# Altium PCB USB.PcbDoc
Units mm, origin at the board's own origin, x right, y up, seen from the top; angles counter-clockwise.
Board outline 25.5 x 25.5 mm, 6 copper layers (1 Top (Sig/Pwr), 2 (GND), 3 (Sig/Pwr), 4 (GND/Sig), 5 (GND), 6 Bottom (Sig/Pwr)), stack 1.74 mm thick; 52 components, 57 nets, 300 pads, 16 vias.
Unrouted connection lines stored in the file: 220.
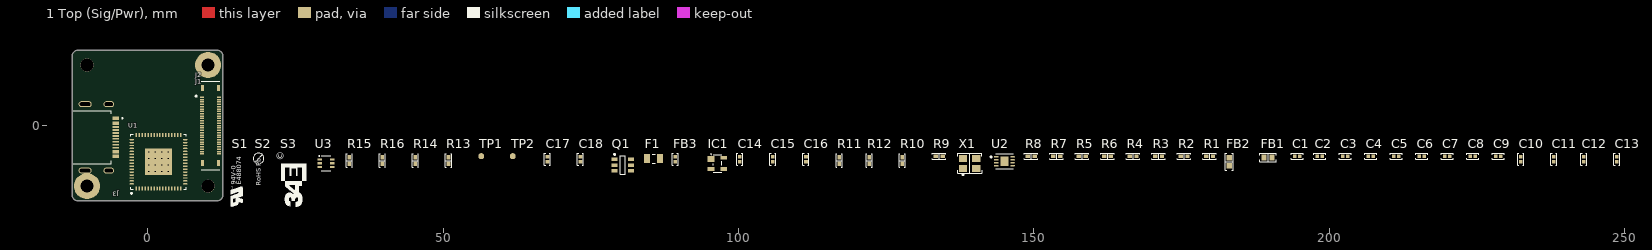
[diagram p0: 1 Top (Sig/Pwr) view]
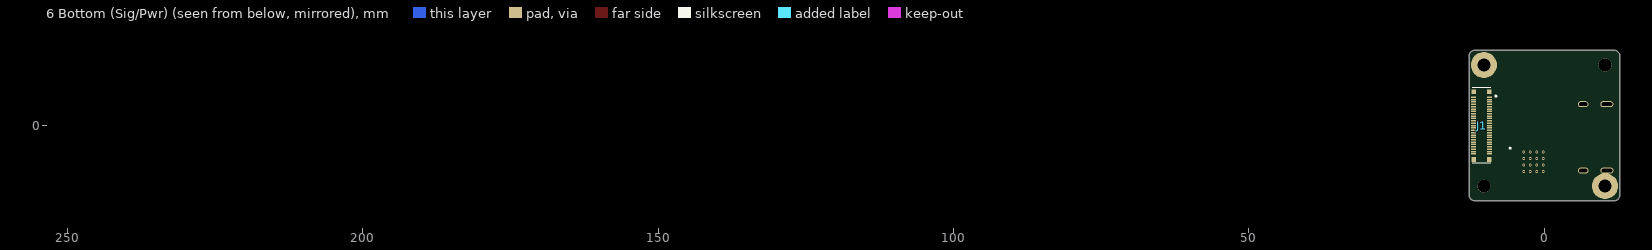
[diagram p1: 6 Bottom (Sig/Pwr) view, seen from below]
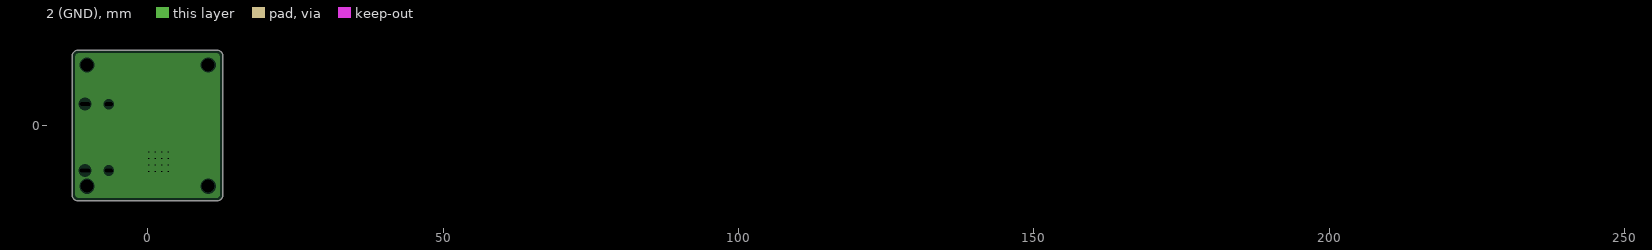
[diagram p2: 2 (GND), clearances drawn from the general rule]
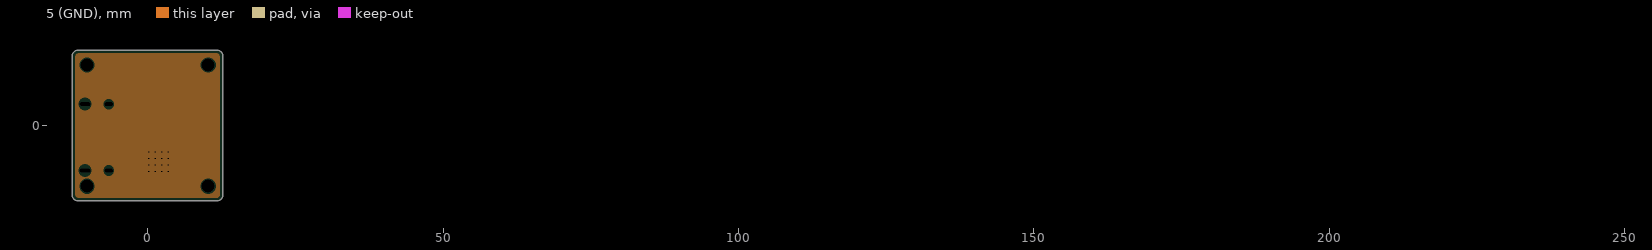
[diagram p3: 5 (GND), clearances drawn from the general rule]

## Layer stack, top to bottom
Top Solder: solder mask 0.0254, SM-001, Dk 4
1 Top (Sig/Pwr): signal copper 0.035
Dielectric 1: prepreg 0.11, PP-015, Dk 4.29
2 (GND): plane copper 0.035, net GND
Dielectric 2: core 0.6, Core-038, Dk 4.6
3 (Sig/Pwr): signal copper 0.035
Dielectric 3: prepreg 0.11, PP-015, Dk 4.29
4 (GND/Sig): signal copper 0.035
Dielectric 4: core 0.6, Core-038, Dk 4.6
5 (GND): plane copper 0.035, net GND
Dielectric 5: prepreg 0.11, PP-015, Dk 4.29
6 Bottom (Sig/Pwr): signal copper 0.035
Bottom Solder: solder mask 0.0254, SM-001, Dk 4

## Board outline
12.75,11.75 12.725,11.973 12.651,12.184 12.532,12.373 12.373,12.532 12.184,12.651 11.973,12.725 11.75,12.75 -11.75,12.75 -11.973,12.725 -12.184,12.651 -12.373,12.532 -12.532,12.373 -12.651,12.184 -12.725,11.973 -12.75,11.75 -12.75,-11.75 -12.725,-11.973 -12.651,-12.184 -12.532,-12.373 -12.373,-12.532 -12.184,-12.651 -11.973,-12.725 -11.75,-12.75 11.75,-12.75 11.973,-12.725 12.184,-12.651 12.373,-12.532 12.532,-12.373 12.651,-12.184 12.725,-11.973 12.75,-11.75

## Design rules (kind name [scope] priority, off if disabled: settings)
BoardOutlineClearance [IsPolygon] p1: gap=0.025 ignorepadtopadclearanceinfootprint=FALSE
Clearance [All] p1: gap=0.152 ignorepadtopadclearanceinfootprint=TRUE except(0.254: SMDPad-SMDPad)
DiffPairsRouting DiffPairsRouting_USB [InDifferentialPair('USB')] p1: maxlimit=0.254 minlimit=0.127 mostfreqgap=0.167 toplayer_mingap=0.254 toplayer_minwidth=0.176 toplayer_maxwidth=0.176 toplayer_prefwidth=0.152 bottomlayer_mingap=0.254 bottomlayer_minwidth=0.176 bottomlayer_maxwidth=0.176 bottomlayer_prefwidth=0.152 impedanceprofiledriven=TRUE impedanceprofileid={CBCFBFA0-D2E2-4D45-9055-C7C9E9EC4FAF} impedanceprofilevalue=90.000000 maxuncoupledlength=12.7
HoleSize [All] p1: absolutevalues=TRUE maxlimit=254 minlimit=0.3 maxpercent=80.000 minpercent=20.000
HoleToHoleClearance HoleToHoleClearance_Via [isVia] p1: gap=0.279 allowstackedmicrovias=TRUE
HoleToHoleClearance [Not isVia] p2: gap=0.406 allowstackedmicrovias=TRUE
MinimumSolderMaskSliver [All] p1: minsoldermaskwidth=0.102
PlaneClearance [All] p1: clearance=0.203
PlaneConnect [All] p1: planeconnectstyle=Direct reliefexpansion=0.508 reliefentries=4 reliefconductorwidth=0.254 reliefairgap=0.254
PolygonConnect PolygonConnect_ThruPin [IsThruPin] p1: thpad.connectstyle=Relief thpad.reliefconductorwidth=0.508 thpad.reliefentries=4 thpad.polygonreliefangle="45 Angle" thpad.airgapwidth=0.254 smdpad.connectstyle=Direct smdpad.reliefconductorwidth=0.254 smdpad.reliefentries=4 smdpad.polygonreliefangle="90 Angle" smdpad.airgapwidth=0.254 via.connectstyle=Relief via.reliefconductorwidth=0.254 via.reliefentries=4 via.polygonreliefangle="90 Angle" via.airgapwidth=0.254
PolygonConnect [All] p2: connectstyle=Direct reliefconductorwidth=0.254 reliefentries=4 polygonreliefangle="90 Angle" airgapwidth=0.254
RoutingVias [All] p1: holewidth=0.3 width=0.5 viastyle="Through Hole" minholewidth=0.3 minwidth=0.5 maxholewidth=0.3 maxwidth=0.5
SilkToSilkClearance [All] p1: silktosilkclearance=0
SilkToSolderMaskClearance [IsPad] p1: minsilkscreentomaskgap=0.152 clearancetoexposedcopper=TRUE
SolderMaskExpansion SolderMaskExpansion_Via [IsVia] p1: expansion=0.102 istentingtop=TRUE
SolderMaskExpansion [Not IsVia] p2: expansion=0.051 istentingtop=FALSE
Width [All] p1: maxlimit=2.032 minlimit=0.152 preferedwidth=0.254 minimp=50.000000 maximp=50.000000 favimp=50.000000
22 further rules are at their usual default settings.

## Classes and differential pairs
differential pair class USB: USB
differential pair USB: +USB_P -USB_N

## Components (designator, comment, footprint, x,y, rotation, side; value= is the part's Value field where it differs from the comment)
C1 "10µF" "CAP 0402_1005" 194.539,-5.207 r0 top
C2 "0.1µF" "CAP 0402_1005" 198.349,-5.207 r0 top
C3 "10µF" "CAP 0402_1005" 202.667,-5.207 r0 top
C4 "0.1µF" "CAP 0402_1005" 206.985,-5.207 r0 top
C5 "10µF" "CAP 0402_1005" 211.303,-5.207 r0 top
C6 "0.1µF" "CAP 0402_1005" 215.621,-5.207 r0 top
C7 "0.1µF" "CAP 0402_1005" 219.939,-5.207 r0 top
C8 "0.1µF" "CAP 0402_1005" 224.257,-5.207 r0 top
C9 "10µF" "CAP 0402_1005" 228.575,-5.207 r0 top
C10 "0.1µF" "CAP 0402_1005" 232.385,-5.715 r90 top
C11 "0.1µF" "CAP 0402_1005" 237.973,-5.715 r90 top
C12 "0.1µF" "CAP 0402_1005" 243.053,-5.715 r90 top
C13 "0.1µF" "CAP 0402_1005" 248.641,-5.715 r90 top
C14 "0.1µF" "CAP 0402_1005" 100.204,-5.715 r90 top
C15 "27pF" "CAP 0402_1005" 105.817,-5.715 r90 top value="27 pF"
C16 "27pF" "CAP 0402_1005" 111.405,-5.715 r90 top value="27 pF"
C17 "0.1µF" "CAP 0402_1005" 67.666,-5.715 r90 top
C18 "10µF" "CAP 0402_1005" 73.254,-5.715 r90 top
F1 "0.75A(H)/1.5A(T)" FP-0ZCK0075FF2E-MFG 85.65,-5.588 r0 top
FB1 "600 Ohms @ 100 MHz" "FER 0603_1608" 189.612,-5.41 r0 top
FB2 "600 Ohms @ 100 MHz" "FER 0603_1608" 183.059,-6.121 r90 top
FB3 "10 Ohms @ 100 MHz" "FER 0402_1005" 89.282,-5.715 r90 top
IC1 "PRTR5V0U2X,215" SOT143B 96.445,-6.401 r0 top
J1 "2049270501" 2049270501 10.65,0 r0 top locked
J2 "2049280501" 2049280501 10.65,0 r0 top locked
J3 "2169900003" 2169900003 -10.56,-2 r270 top
Q1 "DMP3056LDM-7" SOT95P285X130-6N 80.417,-6.68 r0 top
R1 "1k" "RES 0402_1005" 179.731,-5.232 r0 top value="1 kOhms"
R2 "12k 1%" "RES 0402_1005" 175.413,-5.232 r0 top value="12 kOhms"
R3 "100" "RES 0402_1005" 171.095,-5.232 r0 top value="100 Ohms"
R4 "100" "RES 0402_1005" 166.777,-5.232 r0 top value="100 Ohms"
R5 "10k" "RES 0402_1005" 158.167,-5.232 r0 top value="10 kOhms"
R6 "10k" "RES 0402_1005" 162.459,-5.232 r0 top value="10 kOhms"
R7 "100" "RES 0402_1005" 153.849,-5.232 r0 top value="100 Ohms"
R8 "100" "RES 0402_1005" 149.531,-5.232 r0 top value="100 Ohms"
R9 "4.7k 1%" "RES 0402_1005" 133.96,-5.232 r0 top value="4.7 kOhms"
R10 "2.2k 1%" "RES 0402_1005" 127.687,-5.918 r90 top value="2.2 kOhms"
R11 "10k 1%" "RES 0402_1005" 117.019,-5.918 r90 top value="10 kOhms"
R12 "10k 1%" "RES 0402_1005" 122.099,-5.918 r90 top value="10 kOhms"
R13 "5.1k" "RES 0402_1005" 50.928,-5.918 r90 top value="5.1 kOhms"
R14 "5.1k" "RES 0402_1005" 45.314,-5.918 r90 top value="5.1 kOhms"
R15 "100k 1%" "RES 0402_1005" 34.138,-5.918 r90 top value="100 kOhms"
R16 "1M 1%" "RES 0402_1005" 39.726,-5.918 r90 top value="1 MOhms"
S1 "" UL 14.987,-10.135 r90 top
S2 "" RoHS 18.797,-7.518 r90 top
S3 "" 34EngineeringLogo 27.153,-14.046 r90 top
TP1 "" TestPoint1mm 56.465,-5.182 r90 top
TP2 "" TestPoint1mm 61.799,-5.182 r90 top
U1 "FT2232HQ-Tray" QFN64_2_N 1.85,-6.125 r90 top
U2 "AT93C46DY6-YH-T" FP-C04-21355-Q4B-IPC_C 145.009,-6.045 r0 top
U3 "DZDH0401DW-7" DZDH0401DW-7 30.176,-6.375 r0 top
X1 "ABM8G-12.000MHZ-4Y-T3" ABM8G-12.000MHZ-4Y-T3 139.117,-6.401 r0 top

## Footprints (in the part's own frame and the unit in brackets; to place one, negate y for a bottom-side part, rotate by r counter-clockwise, add the part's x,y. Pads: shape width x height; smd on the part's side, far side on the other; paste and mask are expansions set on the pad)
34EngineeringLogo [mm]
  silkscreen extent 0.33,0.32 7.61,4.55
2049270501 [mm]
  rect 0.81x0.25 smd far side paste+0 mask+0: 1(-1.345,4.8) 2(-1.345,4.4) 3(-1.345,4) 4(-1.345,3.6) 5(-1.345,3.2) 6(-1.345,2.8) 7(-1.345,2.4) 8(-1.345,2) 9(-1.345,1.6) 10(-1.345,1.2) 11(-1.345,0.8) 12(-1.345,0.4) 13(-1.345,0) 14(-1.345,-0.4) 15(-1.345,-0.8) 16(-1.345,-1.2) 17(-1.345,-1.6) 18(-1.345,-2) 19(-1.345,-2.4) 20(-1.345,-2.8) 21(-1.345,-3.2) 22(-1.345,-3.6) 23(-1.345,-4) 24(-1.345,-4.4) 25(-1.345,-4.8) 26(1.345,-4.8) 27(1.345,-4.4) 28(1.345,-4) 29(1.345,-3.6) 30(1.345,-3.2) 31(1.345,-2.8) 32(1.345,-2.4) 33(1.345,-2) 34(1.345,-1.6) 35(1.345,-1.2) 36(1.345,-0.8) 37(1.345,-0.4) 38(1.345,0) 39(1.345,0.4) 40(1.345,0.8) 41(1.345,1.2) 42(1.345,1.6) 43(1.345,2) 44(1.345,2.4) 45(1.345,2.8) 46(1.345,3.2) 47(1.345,3.6) 48(1.345,4) 49(1.345,4.4) 50(1.345,4.8)
  rect 0.77x0.8 smd far side paste+0 mask+0: MNT(-1.325,-5.73) MNT(-1.325,5.73) MNT(1.325,-5.73) MNT(1.325,5.73)
  body extent -1.59,-6.41 1.59,6.41
2049280501 [mm]
  rect 0.63x0.25 smd paste+0 mask+0: 1(-1.435,4.8) 2(-1.435,4.4) 3(-1.435,4) 4(-1.435,3.6) 5(-1.435,3.2) 6(-1.435,2.8) 7(-1.435,2.4) 8(-1.435,2) 9(-1.435,1.6) 10(-1.435,1.2) 11(-1.435,0.8) 12(-1.435,0.4) 13(-1.435,0) 14(-1.435,-0.4) 15(-1.435,-0.8) 16(-1.435,-1.2) 17(-1.435,-1.6) 18(-1.435,-2) 19(-1.435,-2.4) 20(-1.435,-2.8) 21(-1.435,-3.2) 22(-1.435,-3.6) 23(-1.435,-4) 24(-1.435,-4.4) 25(-1.435,-4.8) 26(1.435,-4.8) 27(1.435,-4.4) 28(1.435,-4) 29(1.435,-3.6) 30(1.435,-3.2) 31(1.435,-2.8) 32(1.435,-2.4) 33(1.435,-2) 34(1.435,-1.6) 35(1.435,-1.2) 36(1.435,-0.8) 37(1.435,-0.4) 38(1.435,0) 39(1.435,0.4) 40(1.435,0.8) 41(1.435,1.2) 42(1.435,1.6) 43(1.435,2) 44(1.435,2.4) 45(1.435,2.8) 46(1.435,3.2) 47(1.435,3.6) 48(1.435,4) 49(1.435,4.4) 50(1.435,4.8)
  rect 0.5x1 smd paste+0 mask+0: MNT(-1.34,-6.36) MNT(-1.34,6.36) MNT(1.34,-6.36) MNT(1.34,6.36)
  silkscreen extent -2.55,-7.5 1.6,7.5, body extent -1.6,-7.5 1.6,7.5, height 2.37
2169900003 [mm]
  rect 0.6x1.1 smd: A1B12(-3.2,5.15) A4B9(-2.4,5.15) B1A12(3.2,5.15) B4A9(2.4,5.15)
  rect 0.3x1.1 smd: A5(-1.25,5.15) A6(-0.25,5.15) A7(0.25,5.15) A8(1.25,5.15) B5(1.75,5.15) B6(0.75,5.15) B7(-0.75,5.15) B8(-1.75,5.15)
  rrect100% 1x1.8 hole 0.6 slot 1.4 at 90 deg: MNT(-5.62,4) MNT(5.62,4)
  rrect100% 1x2.2 hole 0.6 slot 1.8 at 90 deg: MNT(-5.62,0) MNT(5.62,0)
  silkscreen extent -4.47,-2.02 4.47,6.41, body extent -5.77,-2.1 5.77,5.1, height 2.18
ABM8G-12.000MHZ-4Y-T3 [mil]
  rect 55x47 smd: 1(-43.5,-33.5) 2(43.5,-33.5) 3(43.5,33.5) 4(-43.5,33.5)
  silkscreen extent -81,-80 81,67, body extent -63,-49 63,49, height 39
"CAP 0402_1005" [mm] "Chip Capacitor, 2-Leads, Body 1.02x0.51mm, IPC Medium Density"
  rect 0.6x0.64 smd: 1(-0.44,0) 2(0.44,0)
  silkscreen extent -1,-0.5 1,0.5, body extent -0.5,-0.26 0.5,0.26, height 0.52
DZDH0401DW-7 [mil]
  rect 30.81x14 smd paste+0 mask+0: 1(-41.9,25.59) 2(-41.9,0) 3(-41.9,-25.59) 4(41.9,-25.59) 5(41.9,0) 6(41.9,25.59)
  silkscreen extent -45,-48 32,50, body extent -43,-44 43,44, height 43
"FER 0402_1005" [mm] "Chip Ferrite, 2-Leads, Body 1.02x0.51mm, IPC Medium Density"
  rect 0.6x0.64 smd: 1(-0.44,0) 2(0.44,0)
  silkscreen extent -1,-0.5 1,0.5, body extent -0.5,-0.26 0.5,0.26, height 0.52
"FER 0603_1608" [mm] "Chip Ferrite, 2-Leads, Body 1.60x0.80mm, IPC Medium Density"
  rect 0.9x1 smd: 1(-0.675,0) 2(0.675,0)
  silkscreen extent -1.4,-0.7 1.4,0.7, body extent -0.8,-0.41 0.8,0.41, height 0.82
FP-0ZCK0075FF2E-MFG [mm]
  rect 1x1.5 smd paste+0 mask+0: 1(-1.1,0) 2(1.1,0)
  silkscreen extent -0.23,-0.75 0.23,0.75, body extent -1.7,-0.85 1.7,0.85, height 0.25
FP-C04-21355-Q4B-IPC_C [mm]
  rect 0.761x0.239 smd paste+0 mask+0: 1(-1.376,0.75)
  rrect100% 0.761x0.239 smd paste+0 mask+0: 2(-1.376,0.25) 3(-1.376,-0.25) 4(-1.376,-0.75) 5(1.376,-0.75) 6(1.376,-0.25) 7(1.376,0.25) 8(1.376,0.75)
  rect 1.4x1.6 smd paste-1000 mask+0: 9(0,0)
  silkscreen extent -2.37,-1.3 1.5,1.3, body extent -1.86,-1.1 1.86,1.1, height 0.25
QFN64_2_N [mm] "QFN, 64-Leads, Body 9x9mm, Pitch 0.5mm, Thermal Pad 4.5x4.5mm, IPC Medium Density"
  oval 0.75x0.25 smd: 1(-4.525,3.75) 2(-4.525,3.25) 3(-4.525,2.75) 4(-4.525,2.25) 5(-4.525,1.75) 6(-4.525,1.25) 7(-4.525,0.75) 8(-4.525,0.25) 9(-4.525,-0.25) 10(-4.525,-0.75) 11(-4.525,-1.25) 12(-4.525,-1.75) 13(-4.525,-2.25) 14(-4.525,-2.75) 15(-4.525,-3.25) 16(-4.525,-3.75) 33(4.525,-3.75) 34(4.525,-3.25) 35(4.525,-2.75) 36(4.525,-2.25) 37(4.525,-1.75) 38(4.525,-1.25) 39(4.525,-0.75) 40(4.525,-0.25) 41(4.525,0.25) 42(4.525,0.75) 43(4.525,1.25) 44(4.525,1.75) 45(4.525,2.25) 46(4.525,2.75) 47(4.525,3.25) 48(4.525,3.75)
  oval 0.25x0.75 smd: 17(-3.75,-4.525) 18(-3.25,-4.525) 19(-2.75,-4.525) 20(-2.25,-4.525) 21(-1.75,-4.525) 22(-1.25,-4.525) 23(-0.75,-4.525) 24(-0.25,-4.525) 25(0.25,-4.525) 26(0.75,-4.525) 27(1.25,-4.525) 28(1.75,-4.525) 29(2.25,-4.525) 30(2.75,-4.525) 31(3.25,-4.525) 32(3.75,-4.525) 49(3.75,4.525) 50(3.25,4.525) 51(2.75,4.525) 52(2.25,4.525) 53(1.75,4.525) 54(1.25,4.525) 55(0.75,4.525) 56(0.25,4.525) 57(-0.25,4.525) 58(-0.75,4.525) 59(-1.25,4.525) 60(-1.75,4.525) 61(-2.25,4.525) 62(-2.75,4.525) 63(-3.25,4.525) 64(-3.75,4.525)
  rect 4.5x4.5 smd: 65(0,0)
  silkscreen extent -5.46,-4.69 4.69,4.69, body extent -4.54,-4.54 4.54,4.54, height 1
"RES 0402_1005" [mm] "Chip Resistor, 2-Leads, Body 1.0x0.5mm, IPC Medium Density"
  rect 0.75x0.6 smd: 1(-0.575,0) 2(0.575,0)
  silkscreen extent -1.14,-0.51 1.14,0.51, body extent -0.5,-0.25 0.5,0.25, height 0.35
RoHS [mm]
  silkscreen extent 1.05,-0.9 2.85,0.9
SOT95P285X130-6N [mm] "SOT23, 6-Leads, Body 3.00x2.85mm, Pitch 0.95mm, IPC Medium Density"
  rect 1.05x0.6 smd: 1(-1.375,0.95) 2(-1.375,0) 3(-1.375,-0.95) 4(1.375,-0.95) 5(1.375,0) 6(1.375,0.95)
  silkscreen extent -1.5,-1.55 0.45,1.92, body extent -1.5,-1.55 1.5,1.55, height 1.3
SOT143B [mm] "SOT143, 4-Leads, Body 2.90x2.30mm, Pitch 1.90mm, IPC Medium Density"
  rect 1.15x1 smd: 1(-1.075,0.75)
  rect 1.15x0.6 smd: 2(-1.075,-0.95) 3(1.075,-0.95) 4(1.075,0.95)
  silkscreen extent -1.12,-1.5 0.7,1.6, body extent -1.1,-1.45 1.1,1.45, height 1
TestPoint1mm [mm]
  round 1 smd: 1(0,0)
UL [mm]
  silkscreen extent -3.57,-1.1 -0.22,0.93

## Part data
C1 C3 C5 C9 C18: library part 0402ZD106MAT2A, "CAP CER 10UF 10V X5R 0402", Device Package="0402 (1005 Metric)", Manufacturer="AVX Corporation", Operating Temperature="-55°C ~ 85°C", Supplier Part Number 1=478-10052-1-ND, Temperature Coefficient=X5R, Tolerance=±20%, Voltage - Rated=10V, Applications="General Purpose", Capacitance=10µF, ComponentLink1Description=Datasheet, ComponentLink1URL=http://datasheets.avx.com/cx5r.pdf, ComponentLink2Description="DigiKey Link", ComponentLink2URL=http://digikey.com/product-detail/en/avx-corporation/0402ZD106MAT2A/478-10052-1-ND/6564275, lastupdated="2/8/2022 12:26:50 PM", Lifecycle Status=Active, Minimum Order=1, Mounting Type="Surface Mount, MLCC", Package / Case="0402 (1005 Metric)", Packaging=TapeAndReel, Part Number=0402ZD106MAT2A, Part Status=Active, partid=6854, price=0.24, Series=-, Size / Dimension="0.039\" L x 0.020\" W (1.00mm x 0.50mm)", Supplier 1=DigiKey, Thickness (Max)="0.028\" (0.71mm)"
C2 C4 C6 C7 C8 C10 C11 C12 C13 C14 C17: library part 0402ZC104KAT2A, "CAP CER 0.1UF 10V X7R 0402", Device Package="0402 (1005 Metric)", Manufacturer="AVX Corporation", Operating Temperature="-55°C ~ 125°C", Supplier Part Number 1=478-7891-1-ND, Temperature Coefficient=X7R, Tolerance=±10%, Voltage - Rated=10V, Applications="General Purpose", Capacitance=0.1µF, ComponentLink1Description=Datasheet, ComponentLink1URL=http://datasheets.avx.com/X7RDielectric.pdf, ComponentLink2Description="DigiKey Link", ComponentLink2URL=http://digikey.com/product-detail/en/avx-corporation/0402ZC104KAT2A/478-7891-1-ND/3881514, lastupdated="2/8/2022 12:26:59 PM", Lifecycle Status=Active, Minimum Order=1, Mounting Type="Surface Mount, MLCC", Package / Case="0402 (1005 Metric)", Packaging=TapeAndReel, Part Number=0402ZC104KAT2A, Part Status=Active, partid=1757, price=0.09, Series=-, Size / Dimension="0.039\" L x 0.020\" W (1.00mm x 0.50mm)", Supplier 1=DigiKey, Thickness (Max)="0.022\" (0.55mm)"
C15 C16: library part C0402C270J3GAC7867, "CAP CER 27PF 25V NP0 0402", Capacitance="27 pF", Device Package="0402 (1005 Metric)", Manufacturer=KEMET, Operating Temperature="-55°C ~ 125°C", Supplier Part Number 1=399-14437-1-ND, Temperature Coefficient="C0G, NP0", Tolerance=±5%, Voltage - Rated=25V, Applications="General Purpose", ComponentLink1Description=Datasheet, ComponentLink1URL=https://api.kemet.com/component-edge/download/datasheet/C0402C270J3GACTU.pdf, ComponentLink2Description="DigiKey Link", ComponentLink2URL=https://www.digikey.com/en/products/detail/kemet/C0402C270J3GAC7867/2196521, Features="Low ESL", lastupdated="7/10/2022 8:59:41 AM", Lifecycle Status=Active, Minimum Order=1, Mounting Type="Surface Mount, MLCC", Package / Case="0402 (1005 Metric)", Packaging=TapeAndReel, Part Number=C0402C270J3GAC7867, Part Status=Active, partid=1740, price=0.06, Series="SMD Comm C0G", Size / Dimension="0.039\" L x 0.020\" W (1.00mm x 0.50mm)", Supplier 1=DigiKey, Thickness (Max)="0.022\" (0.55mm)"
F1: library part CMP-16043-000005-1, "PTC RESET FUSE 6V 750MA 0805", Case Code (Imperial)=0805, Case Code (Metric)=2012, Hold Current=750mA, Max Current Rating=40A, Package Quantity=1, Trip Current=1.5A, Case/Package=0805, Lead Free="Lead Free", Packaging="Tape and Reel", Time to Trip=0.2s
FB1 FB2: library part BLM18AG601SN1D, "FERRITE BEAD 600 OHM 0603 1LN", Current Rating (Max)=500mA, DC Resistance (DCR) (Max)=380mOhm, Device Package="0603 (1608 Metric)", Manufacturer="Murata Electronics", Operating Temperature="-55°C ~ 125°C", Supplier Part Number 1=490-1014-1-ND, ComponentLink1Description=Datasheet, ComponentLink1URL=https://www.murata.com/en-us/products/productdata/8796738650142/ENFA0003.pdf, ComponentLink2Description="DigiKey Link", ComponentLink2URL=https://www.digikey.com/en/products/detail/murata-electronics/BLM18AG601SN1D/584225, Height (Max)="0.037\" (0.95mm)", Impedance @ Frequency="600 Ohms @ 100 MHz", lastupdated="7/10/2022 9:43:27 AM", Lifecycle Status=Active, Minimum Order=1, Mounting Type="Surface Mount", Number of Lines=1, Package / Case="0603 (1608 Metric)", Packaging=TapeAndReel, Part Number=BLM18AG601SN1D, Part Status=Active, partid=848, price=0.02, Series="EMIFIL®, BLM18", Size / Dimension="0.063\" L x 0.032\" W (1.60mm x 0.80mm)", Supplier 1=DigiKey
FB3: library part BLM15AG100SN1D, "FERRITE BEAD 10 OHM 0402 1LN", Current Rating (Max)=1A, DC Resistance (DCR) (Max)=25mOhm, Device Package="0402 (1005 Metric)", Manufacturer="Murata Electronics", Operating Temperature="-55°C ~ 125°C", Supplier Part Number 1=490-5176-1-ND, ComponentLink1Description=Datasheet, ComponentLink1URL=https://www.murata.com/en-us/products/productdata/8796740059166/ENFA0018.pdf, ComponentLink2Description="DigiKey Link", ComponentLink2URL=https://www.digikey.com/en/products/detail/murata-electronics/BLM15AG100SN1D/1948283, Height (Max)="0.022\" (0.55mm)", Impedance @ Frequency="10 Ohms @ 100 MHz", lastupdated="7/10/2022 9:42:59 AM", Lifecycle Status=Active, Minimum Order=1, Mounting Type="Surface Mount", Number of Lines=1, Package / Case="0402 (1005 Metric)", Packaging=TapeAndReel, Part Number=BLM15AG100SN1D, Part Status=Active, partid=230, price=0.01, Series="EMIFIL®, BLM15", Size / Dimension="0.039\" L x 0.022\" W (1.00mm x 0.55mm)", Supplier 1=DigiKey
IC1: "TVS DIODE 5.5V SOT143B", Capacitance @ Frequency="1pF @ 1MHz", Device Package="TO-253-4, TO-253AA", Manufacturer="Nexperia USA Inc.", Operating Temperature="-40°C ~ 85°C (TA)", Power Line Protection=Yes, Supplier Device Package=SOT-143B, Supplier Part Number 1=1727-3884-2-ND, Voltage - Breakdown (Min)=6V, Voltage - Reverse Standoff (Typ)="5.5V (Max)", Applications="General Purpose", ComponentLink1Description=Datasheet, ComponentLink1URL=https://assets.nexperia.com/documents/data-sheet/PRTR5V0U2X.pdf, ComponentLink2Description="DigiKey Link", ComponentLink2URL=//digikey.com/product-detail/en/nexperia-usa-inc/PRTR5V0U2X215/1727-3884-2-ND/1163690, lastupdated="12/9/2019 9:29:05 PM", Lifecycle Status=0, Minimum Order=1, Mounting Type="Surface Mount", Package / Case="TO-253-4, TO-253AA", Packaging=TapeAndReel, Part Number=PRTR5V0U2X,215, Part Status=Active, partid=5451, price=0.18, Series=-, Supplier 1=DigiKey, Type="Steering (Rail to Rail)", Unidirectional Channels=2
J1: "SlimStack Board-to-Board Receptacle, 0.40mm Pitch, FSB3 Floating Series, 3.00mm Mated Height, 3.20mm Mated Width, 50...", Manufacturer=Molex, Manufacturer Part Number=203955-0503, Supplier Part Number 1=538-204927-0501, Pricing 1="1=3.72000, 10=3.28000, 50=3.28000, 100=2.61000, 1000=2.16000, 10000=2.01000 (USD)", RoHS=No, Stock 1=8587, Supplier 1=Mouser
J2: "SlimStack Board-to-Board Plug, 0.40mm Pitch, FSB3 Floating Series, 3.00mm Mated Height, 3.20 Mated Width, 50 Circuits", Manufacturer=Molex, Manufacturer Part Number=203955-0503, Supplier Part Number 1=538-204928-0501, Pricing 1="1=4.46000, 10=3.93000, 50=3.93000, 100=3.13000, 500=3.04000, 1000=2.59000, 3000=2.41000, 6000=2.32000, 9000=2.23000, 10000=2.41000 (USD)", RoHS=No, Stock 1=8554, Supplier 1=Mouser
J3: "USB-C (USB TYPE-C) USB 2.0 Receptacle Connector 24 (16+8 Dummy) Position Surface Mount, Right Angle; Through Hole", Manufacturer=Molex, Package=None, Supplier Part Number 1=900-2169900003CT-ND, Availability="In Stock", Check_prices=https://www.snapeda.com/parts/2169900003/Molex/view-part/?ref=eda, Manufacturer Part Number=2169900003, MF=Molex, MP=2169900003, price=None, Pricing 1="1=0.85000, 10=0.70500, 100=0.58720 (USD)", Purchase-URL=https://pricing.snapeda.com/search/part/2169900003/?ref=eda, RoHS=No, SnapEDA_Link=https://www.snapeda.com/parts/2169900003/Molex/view-part/?ref=snap, Stock 1=5473, Supplier 1=Digi-Key
Q1: "Trans Mosfet P-ch 30V 4.3A 6-PIN SOT-26 T/r / Mosfet P-ch 30V 4.3A SOT-26", Case/Package=SOT-26-6, Continuous Drain Current (ID)=4.3A, Drain to Source Breakdown Voltage=-30V, Drain to Source Resistance=45mR, Drain to Source Voltage (Vdss)=30V, Gate to Source Voltage (Vgs)=10V, Input Capacitance=948pF, Manufacturer=Diodes, Manufacturer_Part_Number=DMG4407SSS-13, Max Operating Temperature=150°C, Max Power Dissipation=1.5W, Mfr_Name="Diodes Inc", Min Operating Temperature=-55°C, Package Quantity=3000, Category=MOSFETs, ComponentLink1Description=https://datasheet.ciiva.com/935/ds31449-935056.pdf?src-supplier=Digi-Key, ComponentLink1URL=https://datasheet.ciiva.com/935/ds31449-935056.pdf?src-supplier=Digi-Key, ComponentLink2Description=https://datasheet.ciiva.com/935/ds31449-935055.pdf?src-supplier=Digi-Key, ComponentLink2URL=https://datasheet.ciiva.com/935/ds31449-935055.pdf?src-supplier=Digi-Key, ComponentLink3Description=https://datasheet.ciiva.com/935/ds31449-935057.pdf?src-supplier=Digi-Key, ComponentLink3URL=https://datasheet.ciiva.com/935/ds31449-935057.pdf?src-supplier=Digi-Key, ComponentLink4Description=https://datasheet.ciiva.com/11176/ds31449-11176470.pdf?src-supplier=Avnet, ComponentLink4URL=https://datasheet.ciiva.com/11176/ds31449-11176470.pdf?src-supplier=Avnet, ComponentLink5Description=https://datasheet.ciiva.com/8115/ds31449-8115483.pdf?src-supplier=Avnet, ComponentLink5URL=https://datasheet.ciiva.com/8115/ds31449-8115483.pdf?src-supplier=Avnet, Copyright="Copyright (C) 2022 Ultra Librarian. All rights reserved.", Element Configuration=Single, Fall Time=22.3ns, Height=1.1mm, Lead Free="Lead Free", Length=3mm, Manufacturer Part Number=DMP3056LDM-7, Mount="Surface Mount", Number of Channels=1, Number of Elements=1, Number of Pins=6, Packaging="Cut Tape", Polarity=P-CHANNEL, Power Dissipation=1.5W, Pricing 1="1=0.31620, 10=0.31310, 25=0.30990, 100=0.23530, 250=0.23300, 500=0.20610, 1000=0.19360, 3000=0.17330 (USD)", Radiation Hardening=No, Rds On Max=45mR, REACH SVHC="No SVHC", RefDes=RefDes, Rise Time=6.6ns, RoHS=Yes, RoHS Compliant=Yes, Series=DMP3056, Stock 1=366, Supplier 1="Arrow Electronics", Supplier Part Number 1=DMP3056LDM-7, Turn-Off Delay Time=50.1ns, Turn-On Delay Time=10.2ns, Type=DEV, Weight=0.000529oz, Width=1.6mm
R1: library part RQ73C1E1K0BTD, "RES 1 KOHMS 0.1% 1/16W 0402", Device Package="0402 (1005 Metric)", Manufacturer="TE Connectivity Passive Product", Operating Temperature="-55°C ~ 155°C", Power (Watts)="0.063W, 1/16W", Ratings=AEC-Q200, Resistance="1 kOhms", Supplier Device Package=0402, Supplier Part Number 1=A139941CT-ND, Temperature Coefficient=±10ppm/°C, Tolerance=±0.1%, ComponentLink1Description=Datasheet, ComponentLink1URL=//media.digikey.com/pdf/Data%20Sheets/Tyco%20Electronics%20P%20B%20PDFs/RQ73-0618%20v2.pdf, ComponentLink2Description="DigiKey Link", ComponentLink2URL=https://www.digikey.com/en/products/detail/te-connectivity-passive-product/RQ73C1E1K0BTD/9479889, Composition="Thin Film", Features="Anti-Sulfur, Automotive AEC-Q200", Height - Seated (Max)="0.016\" (0.40mm)", lastupdated="7/10/2022 9:15:05 AM", Lifecycle Status=Active, Minimum Order=1, Number of Terminations=2, Package / Case="0402 (1005 Metric)", Packaging=TapeAndReel, Part Number=RQ73C1E1K0BTD, Part Status=Active, partid=3061, price=0.28, Series=RQ73, Size / Dimension="0.039\" L x 0.020\" W (1.00mm x 0.50mm)", Supplier 1=DigiKey
R2: library part RMCF0402FT12K0, "RES 12K OHM 1% 1/16W 0402", Device Package="0402 (1005 Metric)", Manufacturer="Stackpole Electronics Inc", Operating Temperature="-55°C ~ 155°C", Power (Watts)="0.063W, 1/16W", Ratings=AEC-Q200, Resistance="12 kOhms", Supplier Device Package=0402, Supplier Part Number 1=RMCF0402FT12K0CT-ND, Temperature Coefficient=±100ppm/°C, Tolerance=±1%, ComponentLink1Description=Datasheet, ComponentLink1URL=https://www.seielect.com/catalog/sei-rmcf_rmcp.pdf, ComponentLink2Description="DigiKey Link", ComponentLink2URL=https://www.digikey.com/en/products/detail/stackpole-electronics-inc/RMCF0402FT12K0/1714419, Composition="Thick Film", Features="Automotive AEC-Q200", Height - Seated (Max)="0.016\" (0.40mm)", lastupdated="7/10/2022 9:15:01 AM", Lifecycle Status=Active, Minimum Order=1, Number of Terminations=2, Package / Case="0402 (1005 Metric)", Packaging=CutTape, Part Number=RMCF0402FT12K0, Part Status=Active, partid=4499, price=0.01, Series=RMCF, Size / Dimension="0.039\" L x 0.020\" W (1.00mm x 0.50mm)", Supplier 1=DigiKey
R3 R4 R7 R8: library part RCA0402100RFKED, "RES SMD 100 OHM 1% 1/16W 0402", Device Package="0402 (1005 Metric)", Manufacturer="Vishay Dale", Operating Temperature="-55°C ~ 155°C", Power (Watts)="0.063W, 1/16W", Ratings=AEC-Q200, Resistance="100 Ohms", Supplier Device Package=0402, Supplier Part Number 1=541-2177-1-ND, Temperature Coefficient=±100ppm/°C, Tolerance=±1%, ComponentLink1Description=Datasheet, ComponentLink1URL=http://www.vishay.com/docs/20037/rcae3.pdf, ComponentLink2Description="DigiKey Link", ComponentLink2URL=http://digikey.com/product-detail/en/vishay-dale/RCA0402100RFKED/541-2177-1-ND/4946830, Composition="Thick Film", Features="Anti-Sulfur, Automotive AEC-Q200", Height - Seated (Max)="0.016\" (0.40mm)", lastupdated="7/10/2022 9:15:04 AM", Lifecycle Status=Active, Minimum Order=1, Number of Terminations=2, Package / Case="0402 (1005 Metric)", Packaging=TapeAndReel, Part Number=RCA0402100RFKED, Part Status=Active, partid=3179, price=0.01, Series=RCA, Size / Dimension="0.039\" L x 0.020\" W (1.00mm x 0.50mm)", Supplier 1=DigiKey
R5 R6 R11: library part MCS0402MC1002FE000, "RES SMD 10K OHM 1% 1/10W 0402", Device Package="0402 (1005 Metric)", Manufacturer="Vishay Beyschlag", Operating Temperature="-55°C ~ 175°C", Power (Watts)="0.1W, 1/10W", Ratings=AEC-Q200, Resistance="10 kOhms", Supplier Device Package=0402, Supplier Part Number 1=MCS0402-10.0K-MFCT-ND, Temperature Coefficient=±50ppm/°C, Tolerance=±1%, ComponentLink1Description=Datasheet, ComponentLink1URL=http://www.vishay.com/docs/28760/mcat_pro.pdf, ComponentLink2Description="DigiKey Link", ComponentLink2URL=http://digikey.com/product-detail/en/vishay-beyschlag/MCS0402MC1002FE000/MCS0402-10.0K-MFCT-ND/3883092, Composition="Thin Film", Features="Anti-Sulfur, Automotive AEC-Q200", Height - Seated (Max)="0.015\" (0.37mm)", lastupdated="7/10/2022 9:15:04 AM", Lifecycle Status=Active, Minimum Order=1, Number of Terminations=2, Package / Case="0402 (1005 Metric)", Packaging=TapeAndReel, Part Number=MCS0402MC1002FE000, Part Status=Active, partid=3152, price=0.03, Series="MCS AT - Professional", Size / Dimension="0.039\" L x 0.020\" W (1.00mm x 0.50mm)", Supplier 1=DigiKey
R9: library part RT0402FRE074K7L, "RES SMD 4.7K OHM 1% 1/16W 0402", Device Package="0402 (1005 Metric)", Manufacturer=Yageo, Operating Temperature="-55°C ~ 155°C", Power (Watts)="0.063W, 1/16W", Resistance="4.7 kOhms", Supplier Device Package=0402, Supplier Part Number 1=YAG3347CT-ND, Temperature Coefficient=±50ppm/°C, Tolerance=±1%, ComponentLink1Description=Datasheet, ComponentLink1URL=https://www.yageo.com/upload/media/product/productsearch/datasheet/rchip/PYu-RT_1-to-0.01_RoHS_L_11.pdf, ComponentLink2Description="DigiKey Link", ComponentLink2URL=https://www.digikey.com/en/products/detail/yageo/RT0402FRE074K7L/1072052, Composition="Thin Film", Height - Seated (Max)="0.014\" (0.35mm)", lastupdated="7/10/2022 9:15:04 AM", Lifecycle Status=Active, Minimum Order=1, Number of Terminations=2, Package / Case="0402 (1005 Metric)", Packaging=TapeAndReel, Part Number=RT0402FRE074K7L, Part Status=Active, partid=3198, price=0.01, Series=RT, Size / Dimension="0.039\" L x 0.020\" W (1.00mm x 0.50mm)", Supplier 1=DigiKey
R10: library part SR0402FR-7T2K2L, "RES 2.2K OHM 1% 1/5W 0402", Device Package="0402 (1005 Metric)", Manufacturer=Yageo, Operating Temperature="-55°C ~ 155°C", Power (Watts)="0.2W, 1/5W", Ratings=AEC-Q200, Resistance="2.2 kOhms", Supplier Device Package=0402, Supplier Part Number 1=YAG5818CT-ND, Temperature Coefficient=±100ppm/°C, Tolerance=±1%, ComponentLink1Description=Datasheet, ComponentLink1URL=http://www.yageo.com/documents/recent/PYu-SR_D_F%20tol_RoHS_L_4.pdf, ComponentLink2Description="DigiKey Link", ComponentLink2URL=https://www.digikey.com/en/products/detail/yageo/SR0402FR-7T2K2L/9373092, Composition="Thick Film", Features="Automotive AEC-Q200, Pulse Withstanding", Height - Seated (Max)="0.016\" (0.40mm)", lastupdated="7/10/2022 9:15:01 AM", Lifecycle Status=Active, Minimum Order=1, Number of Terminations=2, Package / Case="0402 (1005 Metric)", Packaging=TapeAndReel, Part Number=SR0402FR-7T2K2L, Part Status=Active, partid=4414, price=0.11, Series=SR, Size / Dimension="0.039\" L x 0.020\" W (1.00mm x 0.50mm)", Supplier 1=DigiKey
R12: library part RCG040210K0FKED, "RES SMD 10K OHM 1% 1/16W 0402", Device Package="0402 (1005 Metric)", Manufacturer="Vishay Dale", Operating Temperature="-55°C ~ 155°C", Power (Watts)="0.063W, 1/16W", Resistance="10 kOhms", Supplier Device Package=0402, Supplier Part Number 1=541-1747-1-ND, Temperature Coefficient=±100ppm/°C, Tolerance=±1%, ComponentLink1Description=Datasheet, ComponentLink1URL=http://www.vishay.com/docs/20047/rcge3.pdf, ComponentLink2Description="DigiKey Link", ComponentLink2URL=https://www.digikey.com/en/products/detail/vishay-dale/RCG040210K0FKED/4172356, Composition="Thick Film", Height - Seated (Max)="0.016\" (0.40mm)", lastupdated="7/10/2022 9:14:58 AM", Lifecycle Status=Active, Minimum Order=1, Number of Terminations=2, Package / Case="0402 (1005 Metric)", Packaging=TapeAndReel, Part Number=RCG040210K0FKED, Part Status=Active, partid=5044, price=0.01, Series="RCG e3", Size / Dimension="0.039\" L x 0.020\" W (1.00mm x 0.50mm)", Supplier 1=DigiKey
R13 R14: library part ERJ-PA2F5101X, "RES SMD 5.1 KOHM 1% 1/5W 0402", Device Package="0402 (1005 Metric)", Manufacturer="Panasonic Electronic Components", Operating Temperature="-55°C ~ 155°C", Power (Watts)="0.2W, 1/5W", Ratings=AEC-Q200, Resistance="5.1 kOhms", Supplier Device Package=402, Supplier Part Number 1=P124488CT-ND, Temperature Coefficient=±100ppm/°C, Tolerance=±1%, ComponentLink1Description=Datasheet, ComponentLink1URL=https://industrial.panasonic.com/cdbs/www-data/pdf/RDO0000/AOA0000C331.pdf, ComponentLink2Description="DigiKey Link", ComponentLink2URL=https://www.digikey.com/en/products/detail/panasonic-electronic-components/ERJ-PA2F5101X/9815254, Composition="Thick Film", Features="Automotive AEC-Q200, Pulse Withstanding", Height - Seated (Max)="0.016\" (0.40mm)", lastupdated="7/10/2022 9:14:48 AM", Lifecycle Status=Active, Minimum Order=1, Number of Terminations=2, Package / Case="0402 (1005 Metric)", Packaging=TapeAndReel, Part Number=ERJ-PA2F5101X, Part Status=Active, partid=8439, price=0.02, Series=ERJ-PA2, Size / Dimension="0.039\" L x 0.020\" W (1.00mm x 0.50mm)", Supplier 1=DigiKey
R15: library part MCS04020C1003FE000, "RES SMD 100K OHM 1% 1/10W 0402", Device Package="0402 (1005 Metric)", Manufacturer="Vishay Beyschlag", Operating Temperature="-55°C ~ 155°C", Power (Watts)="0.1W, 1/10W", Resistance="100 kOhms", Supplier Device Package=0402, Supplier Part Number 1=MCS0402-100K-CFCT-ND, Temperature Coefficient=±50ppm/°C, Tolerance=±1%, ComponentLink1Description=Datasheet, ComponentLink1URL=http://www.vishay.com/docs/28705/mcx0x0xpro.pdf, ComponentLink2Description="DigiKey Link", ComponentLink2URL=http://digikey.com/product-detail/en/vishay-beyschlag/MCS04020C1003FE000/MCS0402-100K-CFCT-ND/2607930, Composition="Thin Film", Features=Anti-Sulfur, Height - Seated (Max)="0.015\" (0.37mm)", lastupdated="7/10/2022 9:15:04 AM", Lifecycle Status=Active, Minimum Order=1, Number of Terminations=2, Package / Case="0402 (1005 Metric)", Packaging=TapeAndReel, Part Number=MCS04020C1003FE000, Part Status=Active, partid=3149, price=0.03, Series="MCS - Professional", Size / Dimension="0.039\" L x 0.020\" W (1.00mm x 0.50mm)", Supplier 1=DigiKey
R16: library part MCS04020C1004FE000, "RES SMD 1M OHM 1% 1/10W 0402", Device Package="0402 (1005 Metric)", Manufacturer="Vishay Beyschlag", Operating Temperature="-55°C ~ 155°C", Power (Watts)="0.1W, 1/10W", Resistance="1 MOhms", Supplier Device Package=0402, Supplier Part Number 1=MCS0402-1.00M-CFCT-ND, Temperature Coefficient=±50ppm/°C, Tolerance=±1%, ComponentLink1Description=Datasheet, ComponentLink1URL=http://www.vishay.com/docs/28705/mcx0x0xpro.pdf, ComponentLink2Description="DigiKey Link", ComponentLink2URL=http://digikey.com/product-detail/en/vishay-beyschlag/MCS04020C1004FE000/MCS0402-1.00M-CFCT-ND/2607931, Composition="Thin Film", Features=Anti-Sulfur, Height - Seated (Max)="0.015\" (0.37mm)", lastupdated="7/10/2022 9:15:04 AM", Lifecycle Status=Active, Minimum Order=1, Number of Terminations=2, Package / Case="0402 (1005 Metric)", Packaging=TapeAndReel, Part Number=MCS04020C1004FE000, Part Status=Active, partid=3158, price=0.03, Series="MCS - Professional", Size / Dimension="0.039\" L x 0.020\" W (1.00mm x 0.50mm)", Supplier 1=DigiKey
S1: library part UL
S2: library part RoHS
S3: library part 34EngineeringLogo, "34 Engineering Silkscreen Logo"
TP1 TP2: library part TestPoint1mm, "Test Point 1mm Diameter"
U1: library part CMP-0078-00003-3, "Dual High Speed USB To Multipurpose UART/FIFO IC, 64-pin QFN, Tray", Manufacturer=FTDI, ComponentLink1Description="Manufacturer URL", ComponentLink1URL=http://www.ftdichip.com/, ComponentLink2Description=Datasheet, ComponentLink2URL=http://www.ftdichip.com/Support/Documents/DataSheets/ICs/DS_FT2232H.pdf, DatasheetVersion="ver 2.21, Jun-2012", PackageDescription="64-Pin Quad Flat No-Lead, 9 x 9 mm Body, 0.5 mm Pitch, 4.35 x 4.35 mm Exposed Pad", PackageReference=QFN64_2, PackageVersion=Jun-12, PartNumber=FT2232HQ-Tray, RevisionNote="DatasheetVersion updated to 2.21 Jun-2012"
U2: library part CMP-06313-000080-1, "IC EEPROM 1KBIT SPI 8MINI MAP", Frequency=2MHz, Max Operating Temperature=85°C, Min Operating Temperature=-40°C, Memory Size=1Kb, Memory Type=Non-Volatile, Mount="Surface Mount", Packaging="Tape and Reel", RoHS Compliant=Yes
U3: "Ideal Diode Controller 40V 300mA 300mW 6-Pin SOT-363 T/R", Manufacturer=Diodes, Mfr_Name="Diodes Inc", Supplier Part Number 1=621-DZDH0401DW-7, Copyright="Copyright (C) 2022 Ultra Librarian. All rights reserved.", Manufacturer Part Number=DZDH0401DW-7, Manufacturer_Part_Number=DZDH0401DW-7, Pricing 1="1=0.43000, 10=0.32400, 50=0.32400, 100=0.17000, 500=0.13800, 1000=0.10600, 3000=0.09000, 10000=0.09000 (USD)", RefDes=RefDes, RoHS=Yes, Stock 1=1625, Supplier 1=Mouser, Type=DEV
X1: "ABRACON - ABM8G-12.000MHZ-4Y-T3 - CRYSTAL, 12MHZ, 10PF, 3.2 X 2.5MM", Case/Package=CSMD, ESR (Equivalent Series Resistance)=120R, Frequency=12MHz, Frequency Stability=30ppm, Load Capacitance=10pF, Manufacturer=Abracon, Max Operating Temperature=60°C, Min Operating Temperature=-10°C, Operating Frequency="12 MHz", Supplier Part Number 1=535-10901-1-ND, Category=Crystals, ComponentLink1Description=https://datasheet.ciiva.com/15116/getdatasheetpartid-719872-15116768.pdf?src-supplier=Verical, ComponentLink1URL=https://datasheet.ciiva.com/15116/getdatasheetpartid-719872-15116768.pdf?src-supplier=Verical, ComponentLink2Description=https://datasheet.ciiva.com/857/abm8g-857959.pdf?src-supplier=Digi-Key, ComponentLink2URL=https://datasheet.ciiva.com/857/abm8g-857959.pdf?src-supplier=Digi-Key, ComponentLink3Description=https://datasheet.ciiva.com/857/abm8g-857960.pdf?src-supplier=Digi-Key, ComponentLink3URL=https://datasheet.ciiva.com/857/abm8g-857960.pdf?src-supplier=Digi-Key, ComponentLink4Description=https://datasheet.ciiva.com/857/abm8g-857961.pdf?src-supplier=Digi-Key, ComponentLink4URL=https://datasheet.ciiva.com/857/abm8g-857961.pdf?src-supplier=Digi-Key, ComponentLink5Description=https://datasheet.ciiva.com/16216/abm8g-16216655.pdf?src-supplier=Future+Electronics, ComponentLink5URL=https://datasheet.ciiva.com/16216/abm8g-16216655.pdf?src-supplier=Future+Electronics, Depth=2.5mm, Frequency Tolerance=30ppm, Height=0.039inch, Lead Free="Lead Free", Length=3.2mm, Manufacturer Part Number=ABM8G-12.000MHZ-4Y-T3, Mount="Surface Mount", Number of Pins=4, Packaging="Tape and Reel", Pricing 1="1=0.67000, 10=0.59600, 50=0.55720, 100=0.49250, 500=0.46656, 1000=0.38880 (USD)", REACH SVHC="No SVHC", RoHS=Yes, Series=ABM8G, Series Resistance=120R, Stock 1=11481, Supplier 1=Digi-Key, Width=0.098inch

## Free pads (board coordinates)
  round 4.4 hole 2.2: 1(-10.25,-10.25) 1(10.25,10.25)
  round 2.2 hole 2.2 unplated: 1(-10.25,10.25) 1(10.25,-10.25)

## Via types
v1: diameter 0.5, hole 0.2, 1 Top (Sig/Pwr) to 6 Bottom (Sig/Pwr), tented both sides, 16 vias

## Nets (pads, with @x,y where several pads share a name; then routed paths per layer and width w, separated by ;. In a path a pad name is that pad's centre, name@x,y a point inside that pad or via, vN(x,y) a via of type N, cw(c..) or ccw(c..) an arc to the next point about the centre after c; other vN are vias at no path point)
1.8V_PG: J1.25 J2.48
+1: J1.50 J2.50
+1.8: C5.2 C6.2 C7.2 C8.2 J1.45 J1.46 J1.47 J2.40 J2.41 J2.43 U1.12 U1.37 U1.64
+2.5: J1.41 J2.25
+3.3: C9.2 C10.2 C11.2 C12.2 C13.2 C14.2 FB1.1 FB2.1 J1.37 J1.38 J2.37 J2.38 R1.1 R5.2 R6.2 R11.1 U1.20 U1.31 U1.42 U1.56 U2.6 U2.8
+5: J1.33 J1.34 J2.34 J2.35 Q1.1 Q1.2 Q1.5 Q1.6 TP2.1 U3.4
+5_USB: C18.2 FB3.2 Q1.4 R9.2 TP1.1 U3.6
+5_USB_UNF: C17.2 F1.2 FB3.1
+5_USB_UNP: F1.1 IC1.4 J3.A4B9 J3.B4A9
+12_CAB: J1.28 J1.29 J1.30 J2.29 J2.31 J2.32
ENC: J3.MNT
GND: C1.1 C2.1 C3.1 C4.1 C5.1 C6.1 C7.1 C8.1 C9.1 C10.1 C11.1 C12.1 C13.1 C14.1 C15.1 C16.1 C17.1 C18.1 IC1.1 J1.1 J1.2 J1.3 J1.4 J1.5 J1.6 J1.7 J1.8 J1.9 J1.10 J1.11 J1.12 J1.13 J1.14 J1.15 J1.16 J1.17 J1.19 J1.22 J1.26 J1.27 J1.31 J1.32 J1.35 J1.36 J1.39 J1.40 J1.42 J1.43 J1.44 J1.48 J1.49 J1.MNT J2.24 J2.26 J2.27 J2.28 J2.30 J2.33 J2.36 J2.39 J2.42 J2.44 J2.45 J2.46 J2.49 J2.MNT J3.A1B12 J3.B1A12 R2.1 R12.1 R13.2 R14.2 R15.1 R16.2 U1.1 U1.5 U1.10 U1.11 U1.13 U1.15 U1.25 U1.35 U1.47 U1.51 U1.65 U2.5 U2.9 X1.2 X1.4
  other v1: 0.2,-7.775 1.3,-7.775 2.4,-7.775 3.5,-7.775 0.2,-6.675 1.3,-6.675 2.4,-6.675 3.5,-6.675 0.2,-5.575 1.3,-5.575 2.4,-5.575 3.5,-5.575 0.2,-4.475 1.3,-4.475 2.4,-4.475 3.5,-4.475
NetR10_2: R10.2 R11.2 U2.4
NetR15_2: R15.2 U3.2
PWR_12V_OFF: J1.18 J2.47
RIO_CS: J1.24 J2.23
RIO_MISO: J1.23 J2.22
RIO_MOSI: J1.21 J2.21
RIO_SCLK: J1.20 J2.20
USB_CC1: J3.A5 R13.1
USB_CC2: J3.B5 R14.1
USB_CLKOUT: J2.14 U1.32
USB_D0: J2.1 U1.16
USB_D1: J2.2 U1.17
USB_D2: J2.3 U1.18
USB_D3: J2.4 U1.19
USB_D4: J2.5 U1.21
USB_D5: J2.6 U1.22
USB_D6: J2.7 U1.23
USB_D7: J2.8 U1.24
USB_EE_CLK: R6.1 U1.62 U2.2
USB_EE_CS: R5.1 U1.63 U2.1
USB_EE_DATA: R10.1 U1.61 U2.3
USB_N: IC1.2 J3.A7 J3.B7 U1.7
USB_OE: J2.15 U1.33
USB_OSCI: C15.2 U1.2 X1.1
USB_OSCO: C16.2 U1.3 X1.3
USB_P: IC1.3 J3.A6 J3.B6 U1.8
USB_PHY: C3.2 C4.2 FB2.2 U1.4
USB_PLL: C1.2 C2.2 FB1.2 U1.9
USB_PWRSAV: R9.1 R12.2 U1.59
USB_RD: J2.11 U1.28
USB_REF: R2.2 U1.6
USB_RESET: R1.2 U1.14
USB_REV_SW: Q1.3 R16.1 U3.3
USB_RXF: J2.9 U1.26
USB_SIWU: J2.13 U1.30
USB_TCK: J2.19 R3.2
USB_TCK_NR: R3.1 U1.38
USB_TDI: J2.17 R4.2
USB_TDI_NR: R4.1 U1.39
USB_TDO: J2.16 R7.2
USB_TDO_NR: R7.1 U1.40
USB_TMS: J2.18 R8.2
USB_TMS_NR: R8.1 U1.41
USB_TXE: J2.10 U1.27
USB_WR: J2.12 U1.29
pads on no net: J3.A8 J3.B8 U1.34 U1.36 U1.43 U1.44 U1.45 U1.46 U1.48 U1.49 U1.50 U1.52 U1.53 U1.54 U1.55 U1.57 U1.58 U1.60 U2.7 U3.1 U3.5

## Polygon pours and split planes (outlines as drawn)
GND on 2 (GND) (split plane): 11.858,12.224 11.961,12.188 12.053,12.13 12.13,12.053 12.188,11.961 12.224,11.858 12.24,11.721 12.24,-11.721 12.224,-11.858 12.188,-11.961 12.13,-12.053 12.053,-12.13 11.961,-12.188 11.858,-12.224 11.721,-12.24 -11.721,-12.24 -11.858,-12.224 -11.961,-12.188 -12.053,-12.13 -12.13,-12.053 -12.188,-11.961 -12.224,-11.858 -12.24,-11.721 -12.24,11.721 -12.224,11.858 -12.188,11.961 -12.13,12.053 -12.053,12.13 -11.961,12.188 -11.858,12.224 -11.721,12.24 11.721,12.24
GND on 5 (GND) (split plane): 11.858,12.224 11.961,12.188 12.053,12.13 12.13,12.053 12.188,11.961 12.224,11.858 12.24,11.721 12.24,-11.721 12.224,-11.858 12.188,-11.961 12.13,-12.053 12.053,-12.13 11.961,-12.188 11.858,-12.224 11.721,-12.24 -11.721,-12.24 -11.858,-12.224 -11.961,-12.188 -12.053,-12.13 -12.13,-12.053 -12.188,-11.961 -12.224,-11.858 -12.24,-11.721 -12.24,11.721 -12.224,11.858 -12.188,11.961 -12.13,12.053 -12.053,12.13 -11.961,12.188 -11.858,12.224 -11.721,12.24 11.721,12.24

## Silkscreen, mask and mechanical layers (free items; w line width, h text height)
Bottom Overlay:
  circle w0.254: c5.792,-3.835 r0.127

## Text inside footprints (layer, text, board x,y; h text height)
J3: Mechanical 13 "PCB EDGE" at -12.385,1.066 h0.8 r270
S1: Top Overlay "E488074" at 15.867,-10.055 h0.8 r90; Top Overlay "94V-0" at 14.907,-10.055 h0.8 r90
S2: Top Overlay "RoHS Pb" at 19.197,-10.184 h0.8 r90
S3: Top Overlay "©" at 23.479,-5.942 h2 r90
U3: Mechanical 13 "*" at 29.566,-6.617 h1.27